# Altium PCB FinalPCB.PcbDoc
Units mm, origin at the board's own origin, x right, y up, seen from the top; angles counter-clockwise.
Board outline 100 x 100 mm, 2 copper layers (Top Layer, Bottom Layer); 21 components, 10 nets, 50 pads, 0 vias.
Unrouted connection lines stored in the file: 37.
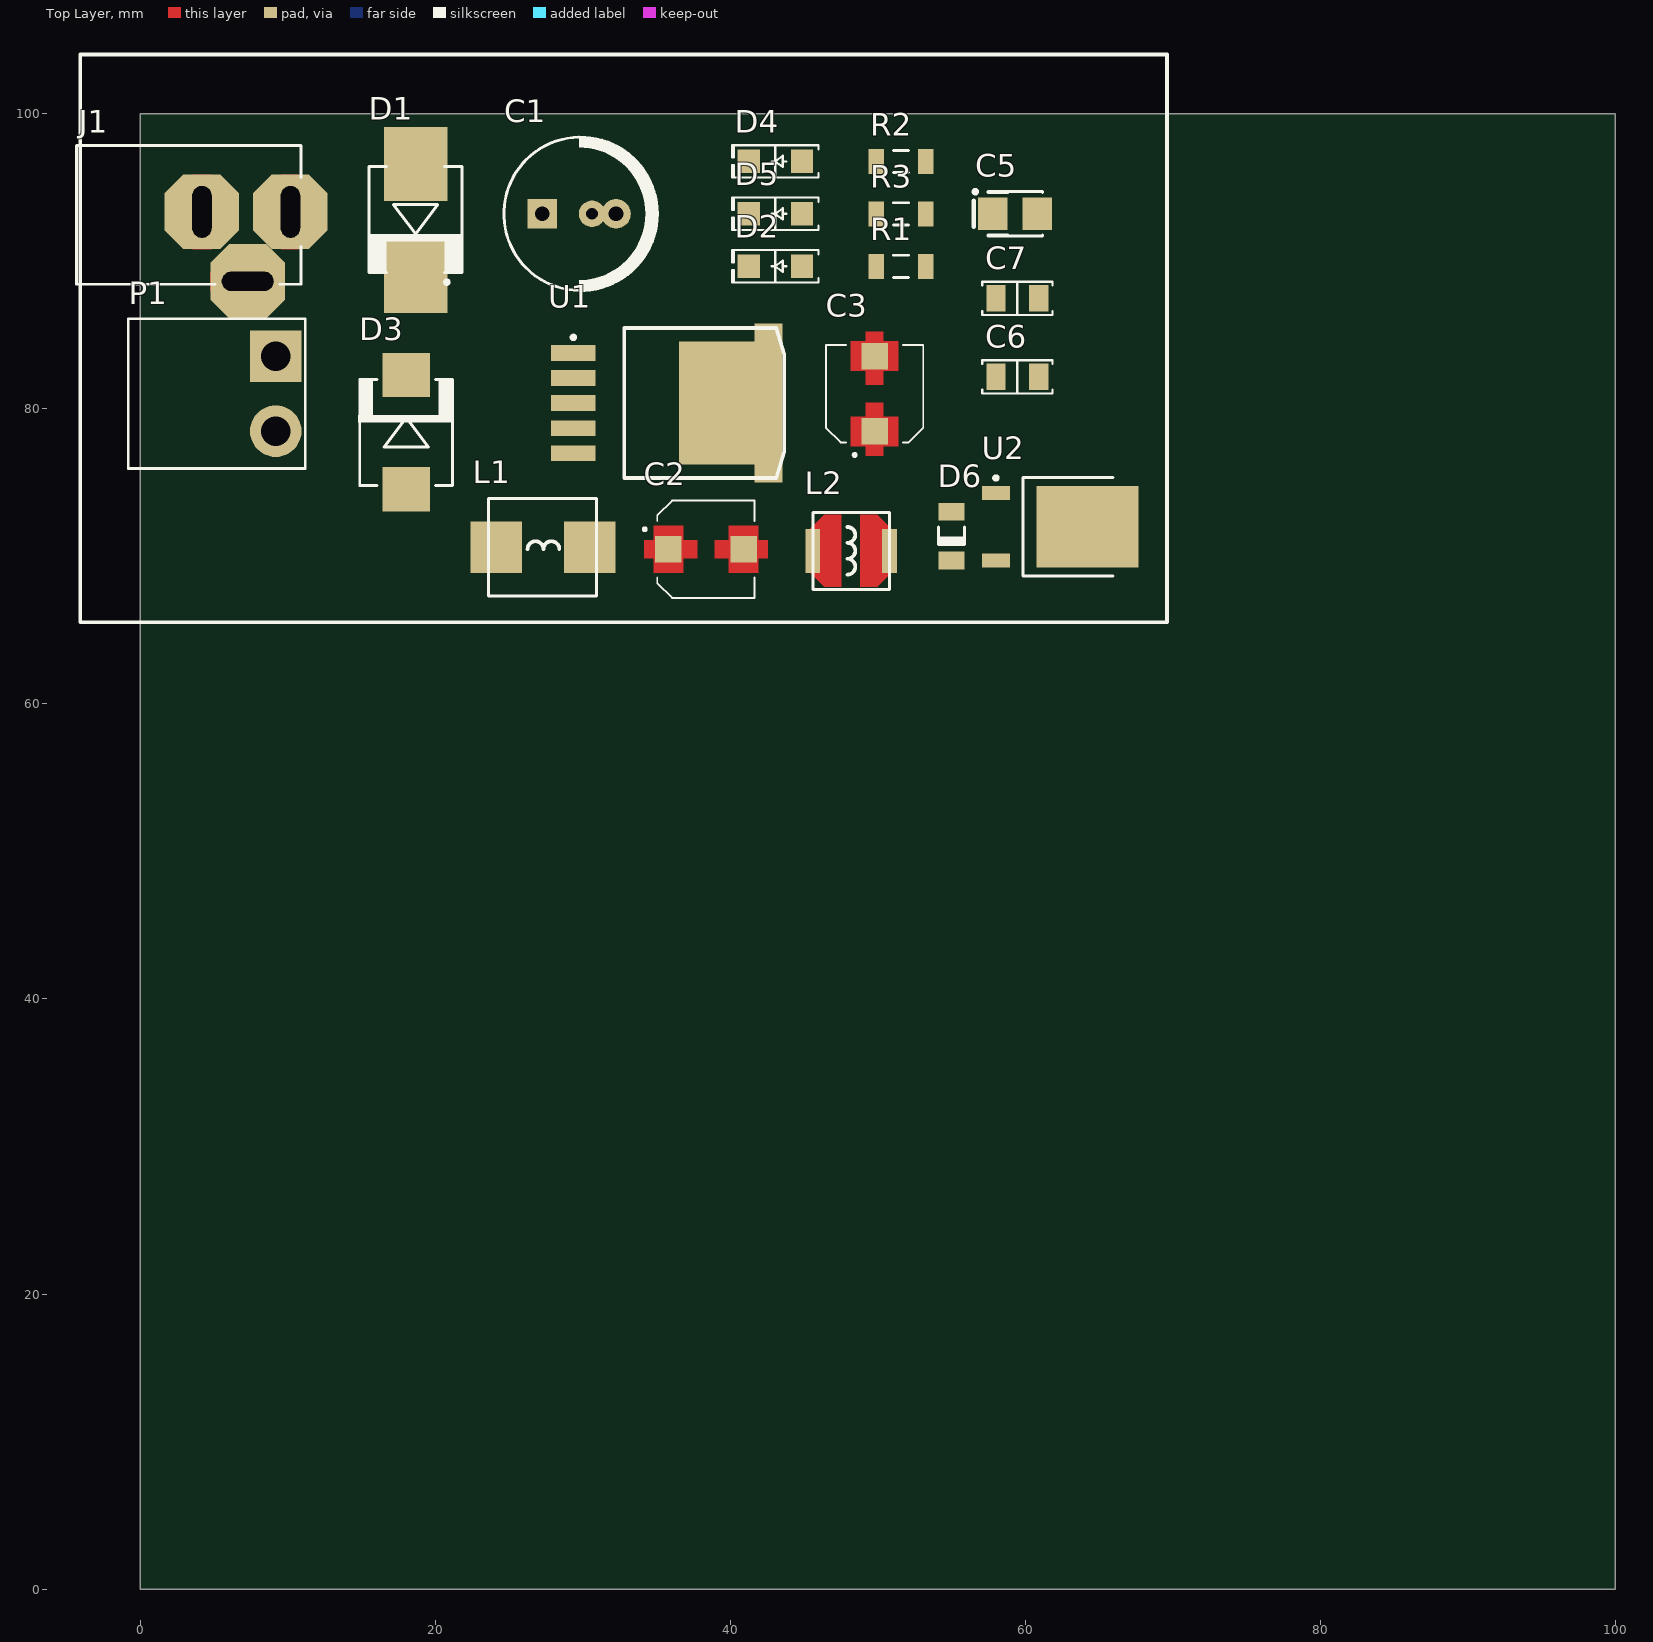
[diagram p0: Top Layer view]
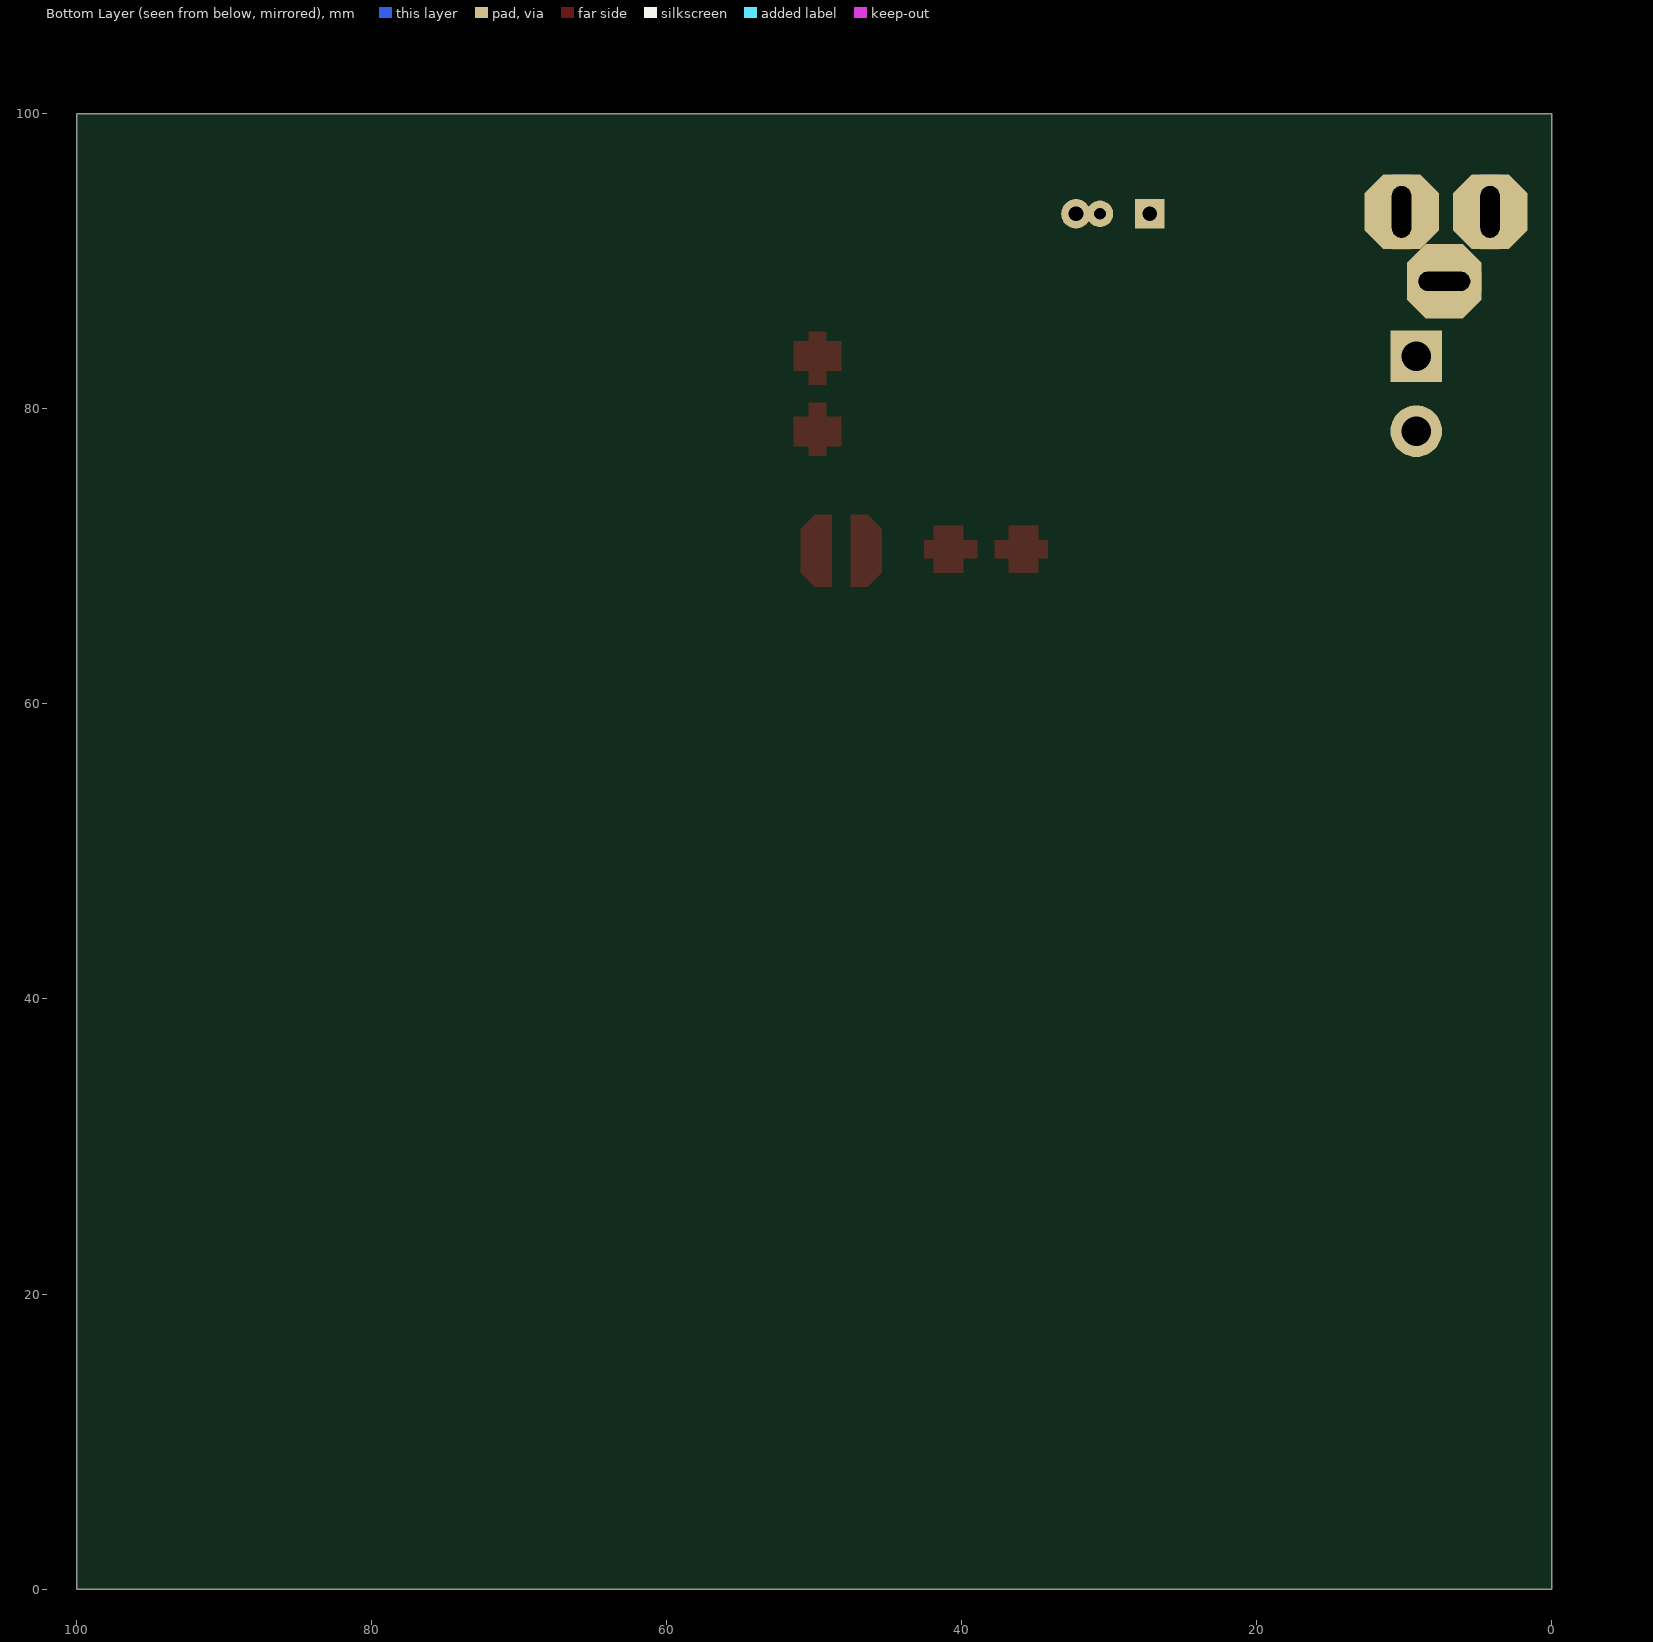
[diagram p1: Bottom Layer view, seen from below]

## Layer stack, top to bottom
Top Solder: solder mask 0.0102, Solder Resist, Dk 3.5
Top Layer: signal copper 0.0356
Dielectric 1: dielectric 0.32, FR-4, Dk 4.8
Bottom Layer: signal copper 0.0356
Bottom Solder: solder mask 0.0102, Solder Resist, Dk 3.5

## Board outline
0,0 100,0 100,100 0,100

## Design rules (kind name [scope] priority, off if disabled: settings)
Clearance [All] p1: gap=0.254 ignorepadtopadclearanceinfootprint=FALSE
PolygonConnect [All] p1: connectstyle=Relief reliefconductorwidth=0.254 reliefentries=4 polygonreliefangle="90 Angle" airgapwidth=0.254
RoutingVias [All] p1: holewidth=0.711 width=1.27 viastyle="Through Hole" minholewidth=0.711 minwidth=1.27 maxholewidth=0.711 maxwidth=1.27
SolderMaskExpansion [All] p1: expansion=0.102 istentingtop=FALSE
SupplyNets "Schematic Supply Nets_3" [InNet('Vin2')] p1: voltage=0.000
SupplyNets "Schematic Supply Nets_2" [InNet('+5')] p2: voltage=0.000
SupplyNets "Schematic Supply Nets_1" [InNet('GND')] p3: voltage=0.000
SupplyNets "Schematic Supply Nets" [InNet('3v3')] p4: voltage=0.000
Width [All] p1: maxlimit=0.254 minlimit=0.254 preferedwidth=0.254
30 further rules are at their usual default settings.

## Components (designator, comment, footprint, x,y, rotation, side; value= is the part's Value field where it differs from the comment)
C1 "1000u'F, 25'V" "Cap electrolitic radial 10x20-5" 29.758,93.218 r0 top
C2 "220uF" PCBComponent_1 38.354,70.485 r0 top
C3 "220uF" PCBComponent_1 49.784,81.026 r90 top
C5 "TanB 10uF" SMT_C_Tantalum_B 59.309,93.218 r0 top value=Value?
C6 "100nF" "CAP 1206/3216" 59.461,82.169 r0 top value="22p'F, 50'V"
C7 "100nF" "CAP 1206/3216" 59.461,87.493 r0 top value="22p'F, 50'V"
D1 "RS5AC THRU RS5MC" DO-214AB(SMC) 18.669,92.837 r270 top value=SK54
D2 "led1206re" "LED 1206/3216 RED" 43.053,89.662 r180 top value="Red, 1206"
D3 "SS34" SS34 18.034,75.057 r90 top value=SK54
D4 "led1206yl" "LED 1206/3216 YELLOW" 43.053,96.774 r180 top value="Yellow, 1206"
D5 "led1206gr" "LED 1206/3216 GREEN" 43.053,93.218 r180 top value="Green, 1206"
D6 "1N4148" LL4148 54.991,71.374 r270 top
J1 "Female" "Power Jack BIG" -4.309,93.345 r0 top
L1 "33uH" Ind7.3x6.6 23.622,67.312 r0 top
L2 "3.3uH" IND5.3x5.3 45.6,72.958 r270 top
P1 "2'Pin" Phoenix_2PIN_RA_P5.08mm 5.193,81.026 r270 top
R1 "1K" "RES 1206 (3216X08L)" 50.272,89.662 r0 top value=Value?
R2 "2k2" "RES 1206 (3216X08L)" 50.272,96.774 r0 top value=Value?
R3 "390r" "RES 1206 (3216X08L)" 50.272,93.218 r0 top value=Value?
U1 "lm2596-5vCTE" D2PAK_TO-263-5 36.449,80.391 r270 top value=Value?
U2 "AMS1117CD" TO252-3N 62.357,72.009 r0 top

## Footprints (in the part's own frame and the unit in brackets; to place one, negate y for a bottom-side part, rotate by r counter-clockwise, add the part's x,y. Pads: shape width x height; smd on the part's side, far side on the other; paste and mask are expansions set on the pad)
"CAP 1206/3216" [mm] "Chip Capacitor, 2-Leads, Body 3.25x1.60mm, IPC Medium Density"
  rect 1.3x1.8 smd: 1(-1.45,0) 2(1.45,0)
  silkscreen extent -2.37,-1.12 2.37,1.12, body extent -1.6,-0.81 1.6,0.81, height 1.62
"Cap electrolitic radial 10x20-5" [mm] "Cap electrolitic radial 10x20-5-Design:Abbas Basereh"
  rect 2x2 hole 1: 1(-2.5,0)
  round 1.8 hole 0.8: 2(0.875,0)
  round 2 hole 1: 2(2.5,0)
  silkscreen extent -5.1,-5.2 5.3,5.2, body extent -5,-5 5,5, height 20
D2PAK_TO-263-5 [mm] "D2-PAK, 6-Pads, Body 7.5x10.2mm (max), IPC Medium Density"
  rect 1.07x3 smd: 1(-3.4,-7.085) 2(-1.7,-7.085) 3(0,-7.085) 4(1.7,-7.085) 5(3.4,-7.085)
  rect 10.8x1.91 smd: 3(0,6.135)
  rect 8.33x7 smd: 3(0,3.59)
  silkscreen extent -5.08,-7.21 5.08,7.21, body extent -4.97,-8.48 5.03,7.19, height 4.78
DO-214AB(SMC) [mm] "Molded Diode, 2-Leads, Body 6/85x5/90mm, IPC Medium Density DESIGNER ABBAS BASEREH"
  rect 5x4.3 smd: 1(-3.75,0) 2(3.825,0.025)
  silkscreen extent -3.6,-3.2 4.37,3.15, body extent -3.77,-3.11 3.77,3.11, height 2.62
IND5.3x5.3 [mm]
  rect 3x1 smd: 1(2.6,0) 2(2.6,5.2)
  Top Layer region: 5.03,1.916 5.03,0.766 4.08,-0.184 1.08,-0.184 0.13,0.766 0.13,1.916
  Top Layer region: 0.13,3.216 0.13,4.366 1.08,5.316 4.08,5.316 5.03,4.366 5.03,3.216
  silkscreen extent 0,0 5.2,5.2, body extent 0,-0.31 5.21,5.61, height 2.8
Ind7.3x6.6 [mm]
  rect 3.5x3.5 smd: 1(0.508,3.3) 2(6.858,3.3)
  silkscreen extent 0,0 7.3,6.6, body extent -0.64,0 7.94,6.6, height 2.9
"LED 1206/3216 GREEN" [mm] "Chip Diode, 2-Leads, Body 3.13x1.55mm, IPC Medium Density"
  rect 1.5x1.6 smd: 1(-1.8,0) 2(1.8,0)
  silkscreen extent -2.92,-1.1 2.92,1.1, body extent -1.6,-0.8 1.6,0.8, height 0.9
"LED 1206/3216 RED" [mm] "Chip Diode, 2-Leads, Body 3.13x1.55mm, IPC Medium Density"
  rect 1.5x1.6 smd: 1(-1.8,0) 2(1.8,0)
  silkscreen extent -2.92,-1.1 2.92,1.1, body extent -1.6,-0.8 1.6,0.8, height 0.9
"LED 1206/3216 YELLOW" [mm] "Chip Diode, 2-Leads, Body 3.13x1.55mm, IPC Medium Density"
  rect 1.5x1.6 smd: 1(-1.8,0) 2(1.8,0)
  silkscreen extent -2.92,-1.1 2.92,1.1, body extent -1.6,-0.8 1.6,0.8, height 0.9
LL4148 [mm] "MELF Diode, 2-Leads, Body 3.5x1.4mm, IPC Medium Density"
  rect 1.2x1.75 smd: 1(-1.65,0) 2(1.65,0)
  silkscreen extent -0.61,-0.88 0.57,0.87, body extent -1.78,-0.75 1.72,0.75, height 1.55
PCBComponent_1 [mm]
  rect 1.8x1.8 smd paste-2 mask+0: 1(-2.55,0) 2(2.55,0)
  Top Layer region: -1.55,0.6 -0.6,0.6 -0.6,-0.6 -1.55,-0.6 -1.55,-1.6 -3.55,-1.6 -3.55,-0.6 -4.2,-0.6 -4.2,0.6 -3.55,0.6 -3.55,1.6 -1.55,1.6
  Top Layer region: 3.55,0.6 4.2,0.6 4.2,-0.6 3.55,-0.6 3.55,-1.6 1.55,-1.6 1.55,-0.6 0.6,-0.6 0.6,0.6 1.55,0.6 1.55,1.6 3.55,1.6
  silkscreen extent -4.25,-3.3 3.3,3.3, body extent -3.65,-3.3 3.65,3.3, height 8
Phoenix_2PIN_RA_P5.08mm [mm] "Phoenix 2 Pin; Pitch 5.08mm; Body 1016X1200"
  rect 3.5x3.5 hole 2: 1(-2.54,4)
  round 3.5 hole 2: 2(2.54,4)
  silkscreen extent -5.08,-6 5.08,6, body extent -5.08,-6 5.08,6, height 8.55
"Power Jack BIG" [mm] "Power Adaptor Jack"
  oct 5.05x5.05 hole 1.3 slot 3.5 at 90 deg: 1(14.5,0) 2(8.5,0)
  oct 5.05x5.05 hole 1.3 slot 3.5 at 0 deg: 3(11.6,-4.7)
  Top Layer region: 13.5,-5.95 14.125,-5.325 14.125,-4.075 13.5,-3.45 9.7,-3.45 9.075,-4.075 9.075,-5.325 9.7,-5.95
  Top Layer region: 7.25,-1.9 7.875,-2.525 9.125,-2.525 9.75,-1.9 9.75,1.9 9.125,2.525 7.875,2.525 7.25,1.9
  Top Layer region: 13.25,-1.9 13.875,-2.525 15.125,-2.525 15.75,-1.9 15.75,1.9 15.125,2.525 13.875,2.525 13.25,1.9
  Bottom Layer region: 13.5,-5.95 14.125,-5.325 14.125,-4.075 13.5,-3.45 9.7,-3.45 9.075,-4.075 9.075,-5.325 9.7,-5.95
  Bottom Layer region: 7.25,-1.9 7.875,-2.525 9.125,-2.525 9.75,-1.9 9.75,1.9 9.125,2.525 7.875,2.525 7.25,1.9
  Bottom Layer region: 13.25,-1.9 13.875,-2.525 15.125,-2.525 15.75,-1.9 15.75,1.9 15.125,2.525 13.875,2.525 13.25,1.9
  silkscreen extent 0,-4.9 15.2,4.5, body extent 0,-4.9 15.2,4.5, height 11
"RES 1206 (3216X08L)" [mm] "Chip Resistor, 2-Leads, Body 3.2x1.6mm, IPC High Density _ (0.125 W)"
  rect 1.05x1.7 smd: 1(-0.377,0) 2(2.973,0)
  silkscreen extent 0.8,-0.75 1.8,0.75, body extent -0.23,-0.76 2.82,0.76, height 0.6
SMT_C_Tantalum_B [mm] "Capacitor, SM Tantalum; Body 3.5 x 2.8 mm (LxW typ)"
  rect 2x2.2 smd: 1(-1.5,0) 2(1.5,0)
  silkscreen extent -2.82,-1.5 1.85,1.62, body extent -1.75,-1.4 1.75,1.4, height 1.9
SS34 [mm]
  rect 3x3.2 smd: 1(-0.508,0) 2(7.239,0)
  silkscreen extent -0.26,-3.15 6.99,3.27, body extent -0.43,-3.11 7.12,3.11, height 2.62
TO252-3N [mm] "D-PAK, 3-Pads, Body 6.2x6.7mm (max), IPC Medium Density"
  rect 1.9x0.95 smd: 1(-4.35,2.28) 3(-4.35,-2.28)
  rect 6.9x5.55 smd: 4(1.85,0)
  silkscreen extent -4.47,-3.35 3.6,3.43, body extent -5.06,-3.27 4.88,3.27, height 2.39

## Part data
C1: library part Cap_Elec_1000u_25, "Electrolit Capacitor", Package=Package?, Rating=Rating?, Inflow=4225, Type=Type?, Validation=NT
C2: library part Cap_SMD7x7, "Cap_SMD7x7"
C3: library part Cap_SMD7x7
C5: library part Cap_Tantalum, "Tantalum Capacitor,TAJ Series-SMD", Package=Package?, Rating=Rating?, Inflow=inflow?, Type=Tantalum, Validation=Valid
C6 C7: library part Cap_Multi_22p_50_1206, "Bipolar ceramic capacitor SMD", Package=Package?, Rating=Rating?, Inflow=5240, Type=Type?, Validation=Valid
D1: library part Semi_Diod_Sch_SK54, "Surface Mount Fast Recovery Rectifiers / Reverse Voltage - 50 to 1000 V / Forward Current - 5 A", Package=SMC, Rating=Rating?, Inflow=5230, Type=Schottky, Validation=Valid
D2: library part Semi_LED_Red_1206, "LED", Package=Package?, Rating=Rating?, Inflow=5253, Type=Type?, Validation=Valid
D3: "Schottky Rectifiers", Package=SMC, Rating=Rating?, Arsham=SS34, Type=Schottky, Validation=Valid
D4: library part Semi_LED_Yellow_1206, "LED", Package=Package?, Rating=Rating?, Inflow=5250, Type=Type?, Validation=Valid
D5: library part Semi_LED_Green_1206, "LED", Package=Package?, Rating=Rating?, Inflow=5247, Type=Type?, Validation=Valid
D6: library part Semi_Diod_STD_1N4148_MELF, "High Conductance Fast Diode", Package=Package?, Rating=Rating?, Inflow=6205, Type=Type?, Validation=NT
J1: library part Con_Power_Jack, "Power Jack", Package=Package?, Rating=Rating?, Inflow=6127, Type=Type?, Validation=Valid
L1: library part "IND 7.3x7.3", "Isat=2.5A / (ohm)max. 240 m-Ohm  @ 100kHz"
L2: library part "IND 5.3x5.3", "Isat=1.74A / (ohm)max. .0.037 @ 100kHz"
P1: library part Con_Power_2, "Power Connector 2'Pin", Package=Package?, Rating=Rating?, Inflow=inflow?, Type=Type?, Validation=NT
R1 R3: library part Res_SMD_1206, "Resistor", Package=1206, Rating=0.25W, Inflow=inflow?, Type=10%, Validation=Valid
R2: library part Res_SMD, "Resistor", Package=Package?, Rating=Rating?, Inflow=inflow?, Type=10%, Validation=Valid
U1: library part IC_Reg_LM2596, "Simple switcher 3'A step-down voltage regulator", Package=TO-263, Rating=S, Inflow=inflow?, Type=Switching, Validation=Valid
U2: library part IC_Reg_AMS1117_CD, "800mA LOW DROPOUT VOLTAGE REGULATOR", Package=Package?, Rating=Rating?, Inflow=inflow?, Type=Type?, Validation=NT

## Nets (pads, with @x,y where several pads share a name; then routed paths per layer and width w, separated by ;. In a path a pad name is that pad's centre, name@x,y a point inside that pad or via, vN(x,y) a via of type N, cw(c..) or ccw(c..) an arc to the next point about the centre after c; other vN are vias at no path point)
3v3: C5.1 C7.1 D6.1 R3.2 U2.4
+5: C3.1 C6.1 D6.2 L2.2 R1.2 U2.3
GND: C1.2 C2.2 C3.2 C5.2 C6.2 C7.2 D2.2 D3.1 D4.2 D5.2 J1.2 P1.1 U1.3 U1.5 U2.1
NetC2_1: C2.1 L1.2 L2.1 U1.4
NetD2_1: D2.1 R1.1
NetD3_2: D3.2 L1.1 U1.2
NetD4_1: D4.1 R2.1
NetD5_1: D5.1 R3.1
Vin1: D1.1 J1.1 P1.2
Vin2: C1.1 D1.2 R2.2 U1.1
pads on no net: J1.3

## Silkscreen, mask and mechanical layers (free items; w line width, h text height)
Top Overlay:
  lines w0.254: -4.064,65.532 69.596,65.532 69.596,104.013 -4.064,104.013 -4.064,65.532
Mechanical 1:
  lines w0.2: -0.1,0 ccw(c0,0) 0,-0.1 ; -0.1,0 ccw(c0,0) 0,-0.1 ; -0.1,0 -0.1,100 ; -0.1,100 cw(c0,100) 0,100.1 ; -0.1,100 cw(c0,100) 0,100.1 ; 0,-0.1 100,-0.1 ; 0,100.1 100,100.1 ; 100,-0.1 ccw(c100,0) 100.1,0 ; 100,-0.1 ccw(c100,0) 100.1,0 ; 100,100.1 cw(c100,100) 100.1,100 ; 100,100.1 cw(c100,100) 100.1,100 ; 100.1,0 100.1,100